# Altium PCB pwnBOT_arduino_sheild.pcbdoc
Units mil, origin at the board's own origin, x right, y up, seen from the top; angles counter-clockwise.
Board outline 4000 x 2100 mil, 2 copper layers (Top Layer, Bottom Layer); 23 components, 79 nets, 149 pads, 9 vias.
Unrouted connection lines stored in the file: 4.
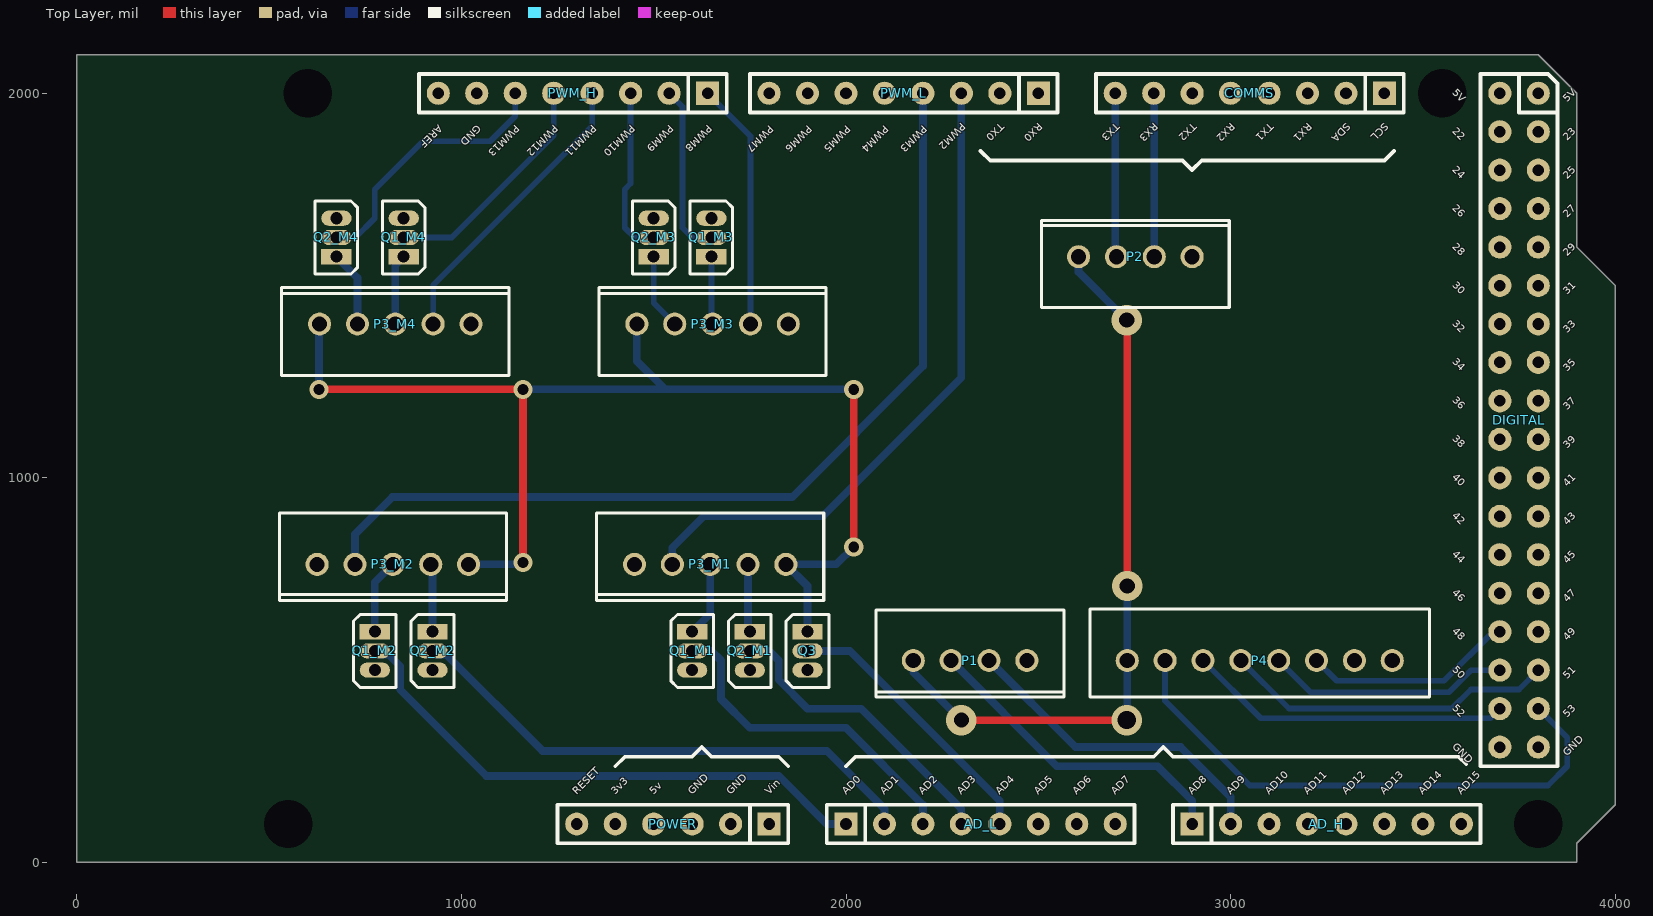
[diagram p0: Top Layer view]
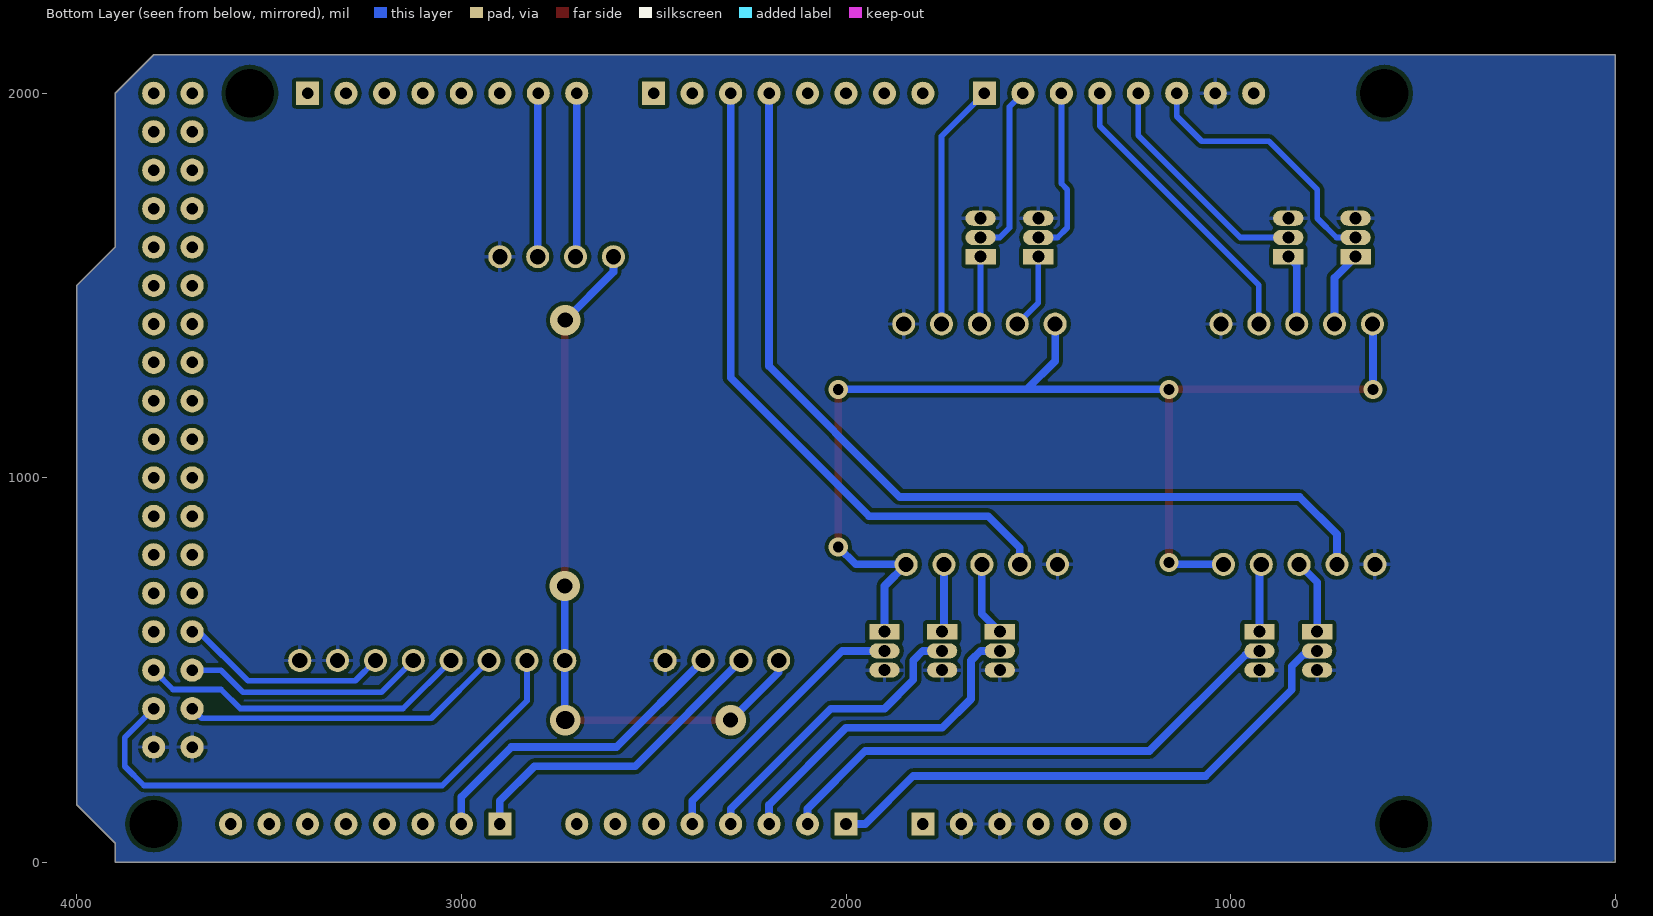
[diagram p1: Bottom Layer view, seen from below]
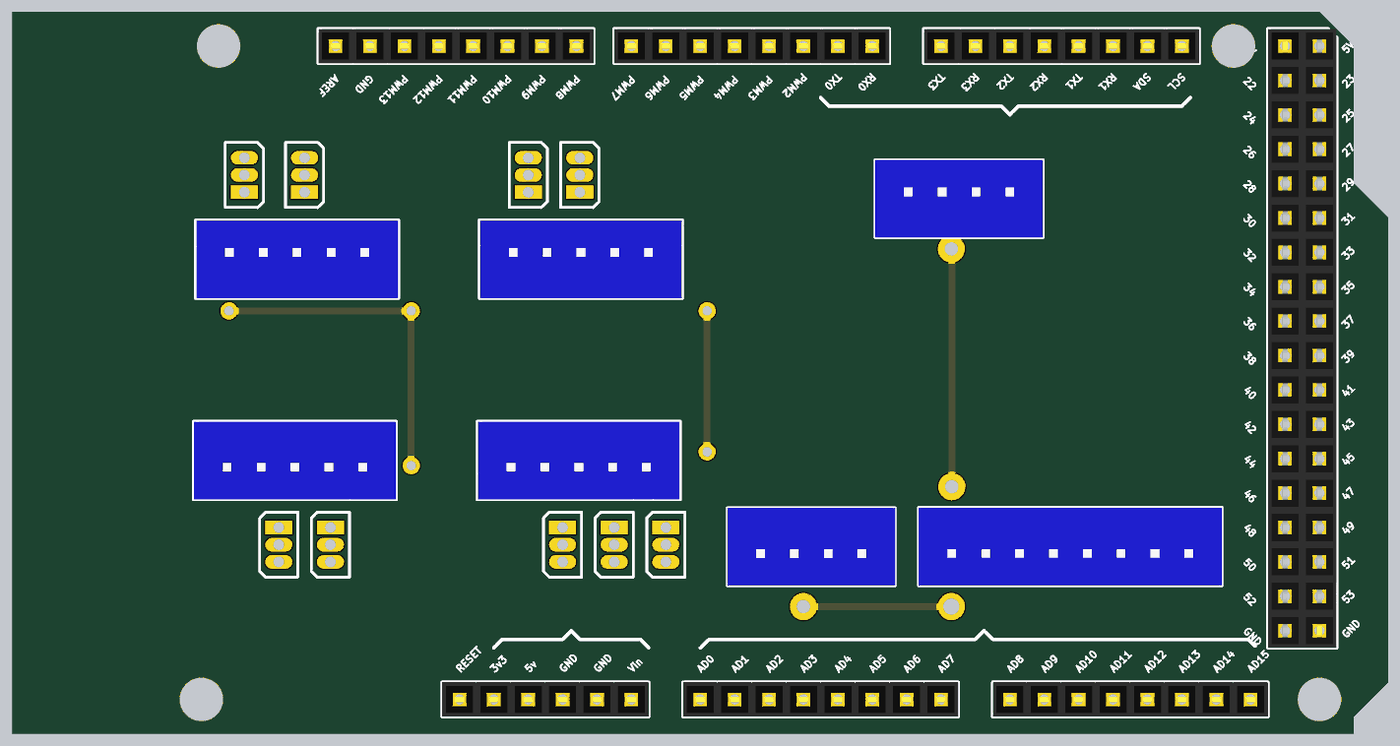
[diagram p2: 3D render of the assembled board from above, using the file's embedded part models]

## Layer stack, top to bottom
Top Solder: solder mask 0.4, Solder Resist, Dk 3.5
Top Layer: signal copper 1.4
Dielectric1: dielectric 12.6, FR-4, Dk 4.8
Bottom Layer: signal copper 1.4
Bottom Solder: solder mask 0.4, Solder Resist, Dk 3.5

## Board outline
0,0 0,2100 3800,2100 3900,2000 3900,1600 4000,1500 4000,150 3900,50 3900,0

## Design rules (kind name [scope] priority, off if disabled: settings)
Clearance [All] p1: gap=10 ignorepadtopadclearanceinfootprint=FALSE
PolygonConnect [All] p1: connectstyle=Relief reliefconductorwidth=10 reliefentries=4 polygonreliefangle="90 Angle" airgapwidth=10
RoutingVias [All] p1: holewidth=28 width=50 viastyle="Through Hole" minholewidth=28 minwidth=50 maxholewidth=28 maxwidth=50
SilkToSolderMaskClearance SilkscreenOverComponentPads [IsPad] p1: minsilkscreentomaskgap=10 clearancetoexposedcopper=TRUE
SolderMaskExpansion [All] p1: expansion=4
Width [All] p1: maxlimit=100 minlimit=15 preferedwidth=20
29 further rules are at their usual default settings.

## Classes and differential pairs
channel class motor_output: M1 M2 M3 M4
component class M4: P3_M4 Q1_M4 Q2_M4
component class M3: P3_M3 Q1_M3 Q2_M3
component class M2: P3_M2 Q1_M2 Q2_M2
component class M1: P3_M1 Q1_M1 Q2_M1
component class "Copy of AdruinoMegaSheild": AD_H AD_L Analog COMMS DIGITAL P1 P2 P4 POWER PWM_H PWM_L Q3

## Components (designator, comment, footprint, x,y, rotation, side; value= is the part's Value field where it differs from the comment)
AD_H "AD_H" "Header 8x1 8.5mm" 2900,100 r0 top locked
AD_L "AD_L" "Header 8x1 8.5mm" 2000,100 r0 top locked
COMMS "Communication" "Header 8x1 8.5mm" 3400,2000 r180 top
DIGITAL "IO_36" "HEADER 36X 8MM" 3800,2000 r270 top locked
P1 "Header 4" B4B-XH-A 2322.64,525 r270 top
P2 "Header 4" B4B-XH-A 2752.36,1575 r90 top
P3_M1 "Header 5" B5B-XH-A 1646.85,775 r270 top (schematic designator P3)
P3_M2 "Header 5" B5B-XH-A 821.85,775 r270 top (schematic designator P3)
P3_M3 "Header 5" B5B-XH-A 1653.15,1400 r90 top (schematic designator P3)
P3_M4 "Header 5" B5B-XH-A 828.15,1400 r90 top (schematic designator P3)
P4 "Header 8" B8B-XH-A 3075.79,525 r270 top
POWER "POWER" "Header 6x1 8.5mm" 1800,100 r180 top locked
PWM_H "PWM_H" "Header 8x1 8.5mm" 1640,2000 r180 top locked
PWM_L "PWM_L" "Header 8x1 8.5mm" 2500,2000 r180 top locked
Q1_M1 "MOSFET-N" Tranny 1415,380 r0 top (schematic designator Q1)
Q1_M2 "MOSFET-N" Tranny 590,380 r0 top (schematic designator Q1)
Q1_M3 "MOSFET-N" Tranny 1835,1795 r180 top (schematic designator Q1)
Q1_M4 "MOSFET-N" Tranny 1035,1795 r180 top (schematic designator Q1)
Q2_M1 "MOSFET-N" Tranny 1565,380 r0 top (schematic designator Q2)
Q2_M2 "MOSFET-N" Tranny 740,380 r0 top (schematic designator Q2)
Q2_M3 "MOSFET-N" Tranny 1685,1795 r180 top (schematic designator Q2)
Q2_M4 "MOSFET-N" Tranny 860,1795 r180 top (schematic designator Q2)
Q3 "MOSFET-N" Tranny 1715,380 r0 top

## Footprints (in the part's own frame and the unit in brackets; to place one, negate y for a bottom-side part, rotate by r counter-clockwise, add the part's x,y. Pads: shape width x height; smd on the part's side, far side on the other; paste and mask are expansions set on the pad)
B4B-XH-A [mil]
  round 60 hole 39.37: 1(0,-147.64) 2(0,-49.21) 3(0,49.21) 4(0,147.64)
  silkscreen extent -132,-244 94,244, body extent -132,-244 94,244, height 276
B5B-XH-A [mil]
  round 60 hole 39.37: 1(0,-196.85) 2(0,-98.43) 3(0,0) 4(0,98.43) 5(0,196.85)
  silkscreen extent -134,-295 94,295, body extent -133,-293 94,293, height 276
B8B-XH-A [mil]
  round 60 hole 39.37: 1(0,-344.49) 2(0,-246.06) 3(0,-147.64) 4(0,-49.21) 5(0,49.21) 6(0,147.64) 7(0,246.06) 8(0,344.49)
  silkscreen extent -134,-441 94,441, body extent -133,-441 94,441, height 276
"Header 6x1 8.5mm" [mil] "Stackable 6 pin header"
  rect 60x60 hole 30: 1(0,0)
  round 60 hole 30: 2(100,0) 3(200,0) 4(300,0) 5(400,0) 6(500,0)
  silkscreen extent -50,-50 550,50, body extent -50,-50 550,50, height 335
"Header 8x1 8.5mm" [mil] "Stackable 8 pin header"
  rect 60x60 hole 30: 1(0,0)
  round 60 hole 30: 2(100,0) 3(200,0) 4(300,0) 5(400,0) 6(500,0) 7(600,0) 8(700,0)
  silkscreen extent -50,-50 750,50, body extent -50,-50 750,50, height 335
"HEADER 36X 8MM" [mil] "Stackable 10 pin header"
  round 60 hole 30: 1(0,0) 2(0,-100) 3(100,0) 4(100,-100) 5(200,0) 6(200,-100) 7(300,0) 8(300,-100) 9(400,0) 10(400,-100) 11(500,0) 12(500,-100) 13(600,0) 14(600,-100) 15(700,0) 16(700,-100) 17(800,0) 18(800,-100) 19(900,-100) 20(900,0) 21(1000,0) 22(1000,-100) 23(1100,0) 24(1100,-100) 25(1200,0) 26(1200,-100) 27(1300,0) 28(1300,-100) 29(1400,0) 30(1400,-100) 31(1500,0) 32(1500,-100) 33(1600,0) 34(1600,-100) 35(1700,0) 36(1700,-100)
  silkscreen extent -50,-150 1750,50, body extent -50,-150 1750,50, height 335
Tranny [mm]
  rect 2x1 hole 0.8: 1(4.699,5.588)
  oval 2x1 hole 0.8: 2(4.699,4.318) 3(4.699,3.048)
  silkscreen extent 3.29,1.91 6.11,6.73

## Part data
AD_H PWM_L: Supplier Part Number 1=2698940, Supplier 1=Arrow, Supplier 2=Arrow, Supplier 3=Digi-Key, Supplier 4=Arrow, Supplier Part Number 2=2698939, Supplier Part Number 3=SAM1198-08-ND, Supplier Part Number 4=2698925
AD_L COMMS PWM_H: Supplier Part Number 1=SAM1198-08-ND, Supplier 1=Digi-Key, Supplier 2=Arrow, Supplier 3=Arrow, Supplier 4=Arrow
  AD_L: Supplier 5=Arrow, Supplier Part Number 2=2698939, Supplier Part Number 3=2698940, Supplier Part Number 4=43085273, Supplier Part Number 5=2698925
  COMMS PWM_H: Supplier Part Number 2=2698940, Supplier Part Number 3=2698939, Supplier Part Number 4=2698925
DIGITAL: Supplier Part Number 1=SAM1196-18-ND, Supplier 1=Digi-Key, Supplier 2=Arrow, Supplier 3=Arrow, Supplier 4=Arrow, Supplier 5=Arrow, Supplier Part Number 2=48117090, Supplier Part Number 3=46093326, Supplier Part Number 4=2698278, Supplier Part Number 5=2698268
P1 P2: "Header, 4-Pin", LatestRevisionDate=17-Jul-2002, LatestRevisionNote="Re-released for DXP Platform.", Publisher="Altium Limited"
P3_M1 P3_M2 P3_M3 P3_M4: "Header, 5-Pin", LatestRevisionDate=17-Jul-2002, LatestRevisionNote="Re-released for DXP Platform.", Publisher="Altium Limited"
P4: "Header, 8-Pin", LatestRevisionDate=17-Jul-2002, LatestRevisionNote="Re-released for DXP Platform.", Publisher="Altium Limited"
POWER: Supplier Part Number 1=52553843, Supplier 1=Arrow, Supplier 2=Arrow, Supplier 3=Digi-Key, Supplier 4=Arrow, Supplier 5=Arrow, Supplier Part Number 2=2699075, Supplier Part Number 3=SAM1198-06-ND, Supplier Part Number 4=2699089, Supplier Part Number 5=2699088
Q1_M1 Q1_M2 Q1_M3 Q1_M4 Q2_M1 Q2_M2 Q2_M3 Q2_M4 Q3: "N-Channel MOSFET", LatestRevisionDate=17-Jul-2002, LatestRevisionNote="Re-released for DXP Platform.", PackageDescription="TO, Flat Index; 3 In-Line, Axial Leads; Body Dia. 4.6mm; Lead Dia. 0.5 mm (max)", PackageReference=E3, PackageVersion=1995/1996, Published=8-Jun-2000, Publisher="Altium Limited"

## Free pads (board coordinates)
  round 62.99 hole 125.98: 0(550,100) 0(600,2000) 0(3550,2000) 0(3800,100)

## Via types
v1: diameter 50, hole 28, Top Layer to Bottom Layer, 5 vias
v2: diameter 78.74, hole 39.37, Top Layer to Bottom Layer, 3 vias
v3: diameter 78.74, hole 47.24, Top Layer to Bottom Layer, 1 vias

## Nets (pads, with @x,y where several pads share a name; then routed paths per layer and width w, separated by ;. In a path a pad name is that pad's centre, name@x,y a point inside that pad or via, vN(x,y) a via of type N, cw(c..) or ccw(c..) an arc to the next point about the centre after c; other vN are vias at no path point)
3V3: POWER.5
5V: DIGITAL.1 DIGITAL.2 P1.1 P2.4 P4.1 POWER.4 | length 1894.7
  Top Layer w20: v2(2300,370) v3(2730,370) ; v2(2730,1410) 2731.3,1408.7 v2(2731.3,718.7)
  Bottom Layer w20: P1.1 2175,495 v2(2300,370) ; P2.4 2604.72,1535.28 v2(2730,1410) ; v3(2730,370) 2731.3,371.3 P4.1 v2(2731.3,718.7)
AD0: AD_H.1 P1.2 | length 837.8
  Bottom Layer w20: P1.2 2548.43,250 2810,250 2900,160 AD_H.1
AD1: AD_H.2 P1.3 | length 845.2
  Bottom Layer w20: P1.3 2596.85,300 2870,300 3000,170 AD_H.2
AD10: AD_H.3
AD11: AD_H.4
AD12: AD_H.5
AD13: AD_H.6
AD14: AD_H.7
AD15: AD_H.8
AREF: PWM_H.8
Break1: AD_L.4 Q2_M1.2 | length 789.1
  Bottom Layer w20: Q2_M1.2 1800,550 1825,525 1825,475 1900,400 2040,400 2300,140 AD_L.4
Break2: AD_L.2 Q2_M2.2 | length 1384.8
  Bottom Layer w20: Q2_M2.2 935.32,539.68 961.12,539.68 1210.81,290 1950,290 2100,140 AD_L.2
Break4: PWM_H.3 Q2_M3.2 | length 441.6
  Bottom Layer w15: PWM_H.3 1440,1765 1425,1750 1425,1650 1450,1625 Q2_M3.2
Break5: PWM_H.6 Q2_M4.2 | length 699.4
  Bottom Layer w15: Q2_M4.2 725,1625 775,1675 775,1750 900,1875 1075,1875 1140,1940 PWM_H.6
BreakT_M1: P3_M1.4 Q2_M1.1 | length 177
  Bottom Layer w20: P3_M1.4 1745.28,604.72 Q2_M1.1
BreakT_M2: P3_M2.4 Q2_M2.1 | length 177
  Bottom Layer w20: P3_M2.4 925,770.28 Q2_M2.1
BreakT_M3: P3_M3.4 Q2_M3.1 | length 204.3
  Bottom Layer w15: Q2_M3.1 1500,1454.72 P3_M3.4
  Bottom Layer w20: P3_M3.4@1550,1395.28 P3_M3.4
BreakT_M4: P3_M4.4 Q2_M4.1 | length 197.7
  Bottom Layer w20: Q2_M4.1 729.72,1520.28 P3_M4.4
DIR1: AD_L.3 Q1_M1.2 | length 874.3
  Bottom Layer w20: Q1_M1.2 1650,550 1675,525 1675,425 1750,350 2000,350 2200,150 AD_L.3
DIR2: AD_L.1 Q1_M2.2 | length 1447
  Bottom Layer w20: Q1_M2.2 785.32,539.68 811.12,539.68 840.81,510 840.81,449.19 1065,225 1825,225 1950,100 AD_L.1
DIR4: PWM_H.2 Q1_M3.2 | length 449.9
  Bottom Layer w15: PWM_H.2 1575,1965 1575,1650 1600,1625 Q1_M3.2
DIR5: PWM_H.5 Q1_M4.2 | length 609.8
  Bottom Layer w15: Q1_M4.2 975,1625 1240,1890 PWM_H.5
DirT_M1: P3_M1.3 Q1_M1.1 | length 194.4
  Bottom Layer w20: Q1_M1.1 1646.85,646.85 P3_M1.3
DirT_M2: P3_M2.3 Q1_M2.1 | length 194.4
  Bottom Layer w20: Q1_M2.1 775,728.15 P3_M2.3
DirT_M3: P3_M3.3 Q1_M3.1 | length 176.3
  Bottom Layer w15: Q1_M3.1 1650,1403.15 P3_M3.3
DirT_M4: P3_M4.3 Q1_M4.1 | length 184.1
  Bottom Layer w20: P3_M4.3 828.15,1553.15 Q1_M4.1
EN: P3_M1.5 P3_M2.5 P3_M3.5 P3_M4.5 Q3.1 | length 3174
  Top Layer w20: v1(630,1230) v1(1160,1230) v1(1160,780) ; v1(2020,820) v1(2020,1230)
  Bottom Layer w20: v1(630,1230) 630,1398.7 P3_M4.5 ; P3_M2.5@1018.7,791.3 P3_M2.5 1155,775 v1(1160,780) ; v1(1160,1230) 1530,1230 ; P3_M3.5 1456.3,1303.7 1530,1230 ; Q3.1 1900,718.7 P3_M1.5 1975,775 v1(2020,820) ; v1(2020,1230) 1530,1230
ENM: AD_L.5 Q3.2 | length 721.5
  Bottom Layer w20: Q3.2 2010,550 2400,160 AD_L.5
GND: DIGITAL.35 DIGITAL.36 P1.4 P2.1 P3_M1.1 P3_M2.1 P3_M3.1 P3_M4.1 P4.7 P4.8 POWER.2 POWER.3 PWM_H.7 Q1_M1.3 Q1_M2.3 Q1_M3.3 Q1_M4.3 Q2_M1.3 Q2_M2.3 Q2_M3.3 Q2_M4.3 Q3.3
IO22: DIGITAL.3
IO23: DIGITAL.4
IO24: DIGITAL.5
IO25: DIGITAL.6
IO26: DIGITAL.7
IO27: DIGITAL.8
IO28: DIGITAL.9
IO29: DIGITAL.10
IO30: DIGITAL.11
IO31: DIGITAL.12
IO32: DIGITAL.13
IO33: DIGITAL.14
IO34: DIGITAL.15
IO35: DIGITAL.16
IO36: DIGITAL.17
IO37: DIGITAL.18
IO38: DIGITAL.19
IO39: DIGITAL.20
IO40: DIGITAL.21
IO41: DIGITAL.22
IO42: DIGITAL.23
IO43: DIGITAL.24
IO44: DIGITAL.25
IO45: DIGITAL.26
IO46: DIGITAL.27
IO47: DIGITAL.28
MISO: DIGITAL.31 P4.4 | length 866.6
  Bottom Layer w15: P4.4 3151.57,400 3575,400 3625,450 3750,450 DIGITAL.31
MOSI: DIGITAL.32 P4.5 | length 633
  Bottom Layer w15: P4.5 3207.5,442.5 3567.5,442.5 3625,500 DIGITAL.32
MOT: DIGITAL.30 P4.6 | length 551.1
  Bottom Layer w15: P4.6 3275.93,472.5 3555.07,472.5 3682.57,600 DIGITAL.30
PWM2: P3_M1.2 PWM_L.3 | length 1717.9
  Bottom Layer w20: P3_M1.2 1548.43,818.43 1630,900 1940,900 2300,1260 PWM_L.3
PWM3: P3_M2.2 PWM_L.4 | length 2445.8
  Bottom Layer w20: P3_M2.2 723.43,853.43 820,950 1860,950 2200,1290 PWM_L.4
PWM4: P3_M3.2 PWM_H.1 PWM_L.5 | length 646.2
  Bottom Layer w15: PWM_H.1 1751.57,1888.43 P3_M3.2
PWM5: P3_M4.2 PWM_H.4 | length 771.2
  Bottom Layer w15: P3_M4.2 926.57,1501.57 1340,1915 PWM_H.4
PWM6: PWM_L.7
PWM7: PWM_L.8
RESET: POWER.6
RX0: PWM_L.1
RX1: COMMS.3
RX2: COMMS.5
RX3: COMMS.7 P2.2 | length 425.7
  Bottom Layer w20: COMMS.7 2801.57,1998.43 P2.2
SCK: DIGITAL.33 P4.2 | length 1443
  Bottom Layer w15: P4.2 2829.72,420.28 3050,200 3825,200 3875,250 3875,325 DIGITAL.33
SCL: COMMS.1
SDA: COMMS.2
SS: DIGITAL.34 P4.3 | length 844.3
  Bottom Layer w15: P4.3 3078.15,375 3675,375 DIGITAL.34
TX0: PWM_L.2
TX1: COMMS.4
TX2: COMMS.6
TX3: COMMS.8 P2.3 | length 426.3
  Bottom Layer w20: COMMS.8 2700,1578.15 P2.3
VIN: POWER.1
pads on no net: AD_L.6 AD_L.7 AD_L.8 DIGITAL.29 PWM_L.6

## Polygon pours and split planes (outlines as drawn)
GND on Bottom Layer "Bottom Layer-No Net" (solid, pour order 0): 0,2100 3800,2100 3900,2000 3900,1600 4000,1500 4000,150 3900,50 3900,0 10,0 0,10

## Silkscreen, mask and mechanical layers (free items; w line width, h text height)
Top Overlay:
  lines w10: 1400,250 1425,275 1600,275 1625,300 1650,275 1825,275 1850,250 ; 2000,250 2025,275 2800,275 2825,300 2850,275 3592.93,275 3612.7,255.23 ; 2350,1850 2375,1825 2875,1825 2900,1800 2925,1825 3400,1825 3425,1850
  text "5V" at 3575,2000 h20 r315
  text "5V" at 3875,1975 h20 r45
  text "PWM2" at 2300,1925 h20 r225
  text "TX0" at 2400,1925 h20 r225
  text "RX0" at 2500,1925 h20 r225
  text "TX3" at 2700,1925 h20 r225
  text "RX3" at 2800,1925 h20 r225
  text "TX2" at 2900,1925 h20 r225
  text "RX2" at 3000,1925 h20 r225
  text "TX1" at 3100,1925 h20 r225
  text "RX1" at 3200,1925 h20 r225
  text "SDA" at 3300,1925 h20 r225
  text "SCL" at 3400,1925 h20 r225
  text "AREF" at 940,1920 h20 r225
  text "GND" at 1040,1920 h20 r225
  text "PWM13" at 1140,1920 h20 r225
  text "PWM12" at 1240,1920 h20 r225
  text "PWM11" at 1340,1920 h20 r225
  text "PWM10" at 1440,1920 h20 r225
  text "PWM9" at 1540,1920 h20 r225
  text "PWM8" at 1640,1920 h20 r225
  text "PWM7" at 1800,1917.93 h20 r225
  text "PWM6" at 1900,1917.93 h20 r225
  text "PWM5" at 2000,1917.93 h20 r225
  text "PWM4" at 2100,1917.93 h20 r225
  text "PWM3" at 2200,1917.93 h20 r225
  text "22" at 3575,1900 h20 r315
  text "23" at 3875,1875 h20 r45
  text "24" at 3575,1800 h20 r315
  text "25" at 3875,1775 h20 r45
  text "26" at 3575,1700 h20 r315
  text "27" at 3875,1675 h20 r45
  text "28" at 3575,1600 h20 r315
  text "29" at 3875,1575 h20 r45
  text "30" at 3575,1500 h20 r315
  text "31" at 3875,1475 h20 r45
  text "32" at 3575,1400 h20 r315
  text "33" at 3875,1375 h20 r45
  text "34" at 3575,1300 h20 r315
  text "35" at 3875,1275 h20 r45
  text "36" at 3575,1200 h20 r315
  text "37" at 3875,1175 h20 r45
  text "38" at 3575,1100 h20 r315
  text "39" at 3875,1075 h20 r45
  text "40" at 3575,1000 h20 r315
  text "41" at 3875,975 h20 r45
  text "42" at 3575,900 h20 r315
  text "43" at 3875,875 h20 r45
  text "44" at 3575,800 h20 r315
  text "45" at 3875,775 h20 r45
  text "46" at 3575,700 h20 r315
  text "47" at 3875,675 h20 r45
  text "48" at 3575,600 h20 r315
  text "49" at 3875,575 h20 r45
  text "50" at 3575,500 h20 r315
  text "51" at 3875,475 h20 r45
  text "52" at 3575,400 h20 r315
  text "53" at 3875,375 h20 r45
  text "GND" at 3575,300 h20 r315
  text "GND" at 3875,275 h20 r45
  text "RESET" at 1300,175 h20 r45
  text "3v3" at 1400,175 h20 r45
  text "5v" at 1500,175 h20 r45
  text "GND" at 1600,175 h20 r45
  text "GND" at 1700,175 h20 r45
  text "Vin" at 1800,175 h20 r45
  text "AD0" at 2000,175 h20 r45
  text "AD1" at 2100,175 h20 r45
  text "AD2" at 2200,175 h20 r45
  text "AD3" at 2300,175 h20 r45
  text "AD4" at 2400,175 h20 r45
  text "AD5" at 2500,175 h20 r45
  text "AD6" at 2600,175 h20 r45
  text "AD7" at 2700,175 h20 r45
  text "AD8" at 2900,175 h20 r45
  text "AD9" at 3000,175 h20 r45
  text "AD10" at 3100,175 h20 r45
  text "AD11" at 3200,175 h20 r45
  text "AD12" at 3300,175 h20 r45
  text "AD13" at 3400,175 h20 r45
  text "AD14" at 3500,175 h20 r45
  text "AD15" at 3600,175 h20 r45
Mechanical 1:
  circle w5: c600,2000 r62.99
  circle w5: c550,100 r62.99
  circle w5: c3550,2000 r62.99
  circle w5: c3800,100 r62.99
  lines w5: 0,0 3900,0 3900,50 4000,150 4000,1500 3900,1600 3900,2000 3800,2100 0,2100 0,0